# Altium PCB 8051.PcbDoc
Units mil, origin at the board's own origin, x right, y up, seen from the top; angles counter-clockwise.
Board outline 1970 x 1985 mil, 2 copper layers (Top Layer, Bottom Layer); 38 components, 61 nets, 222 pads, 176 vias.
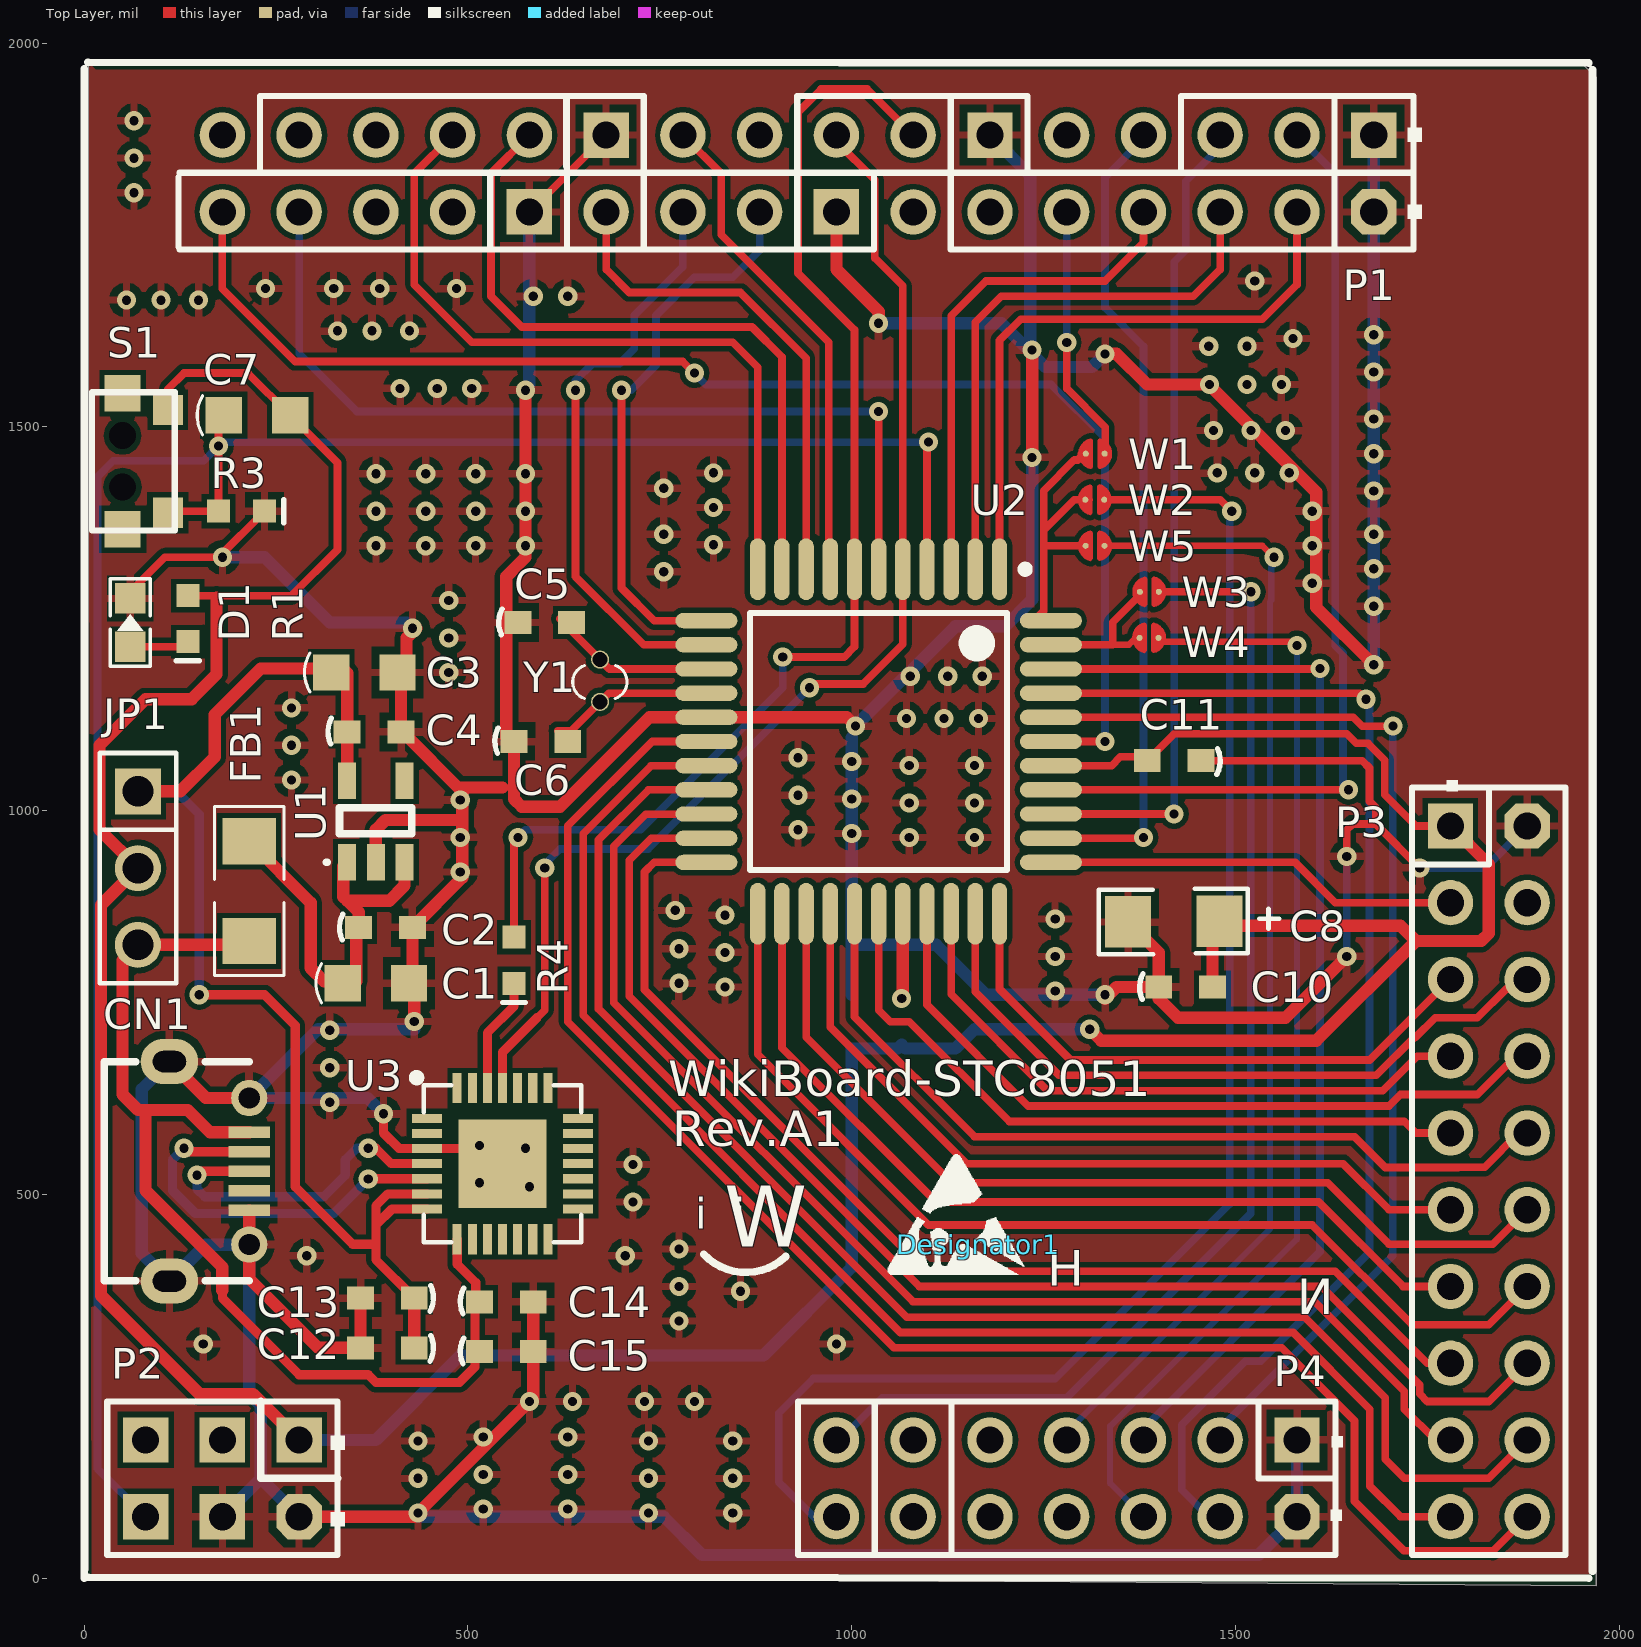
[diagram p0: Top Layer view]
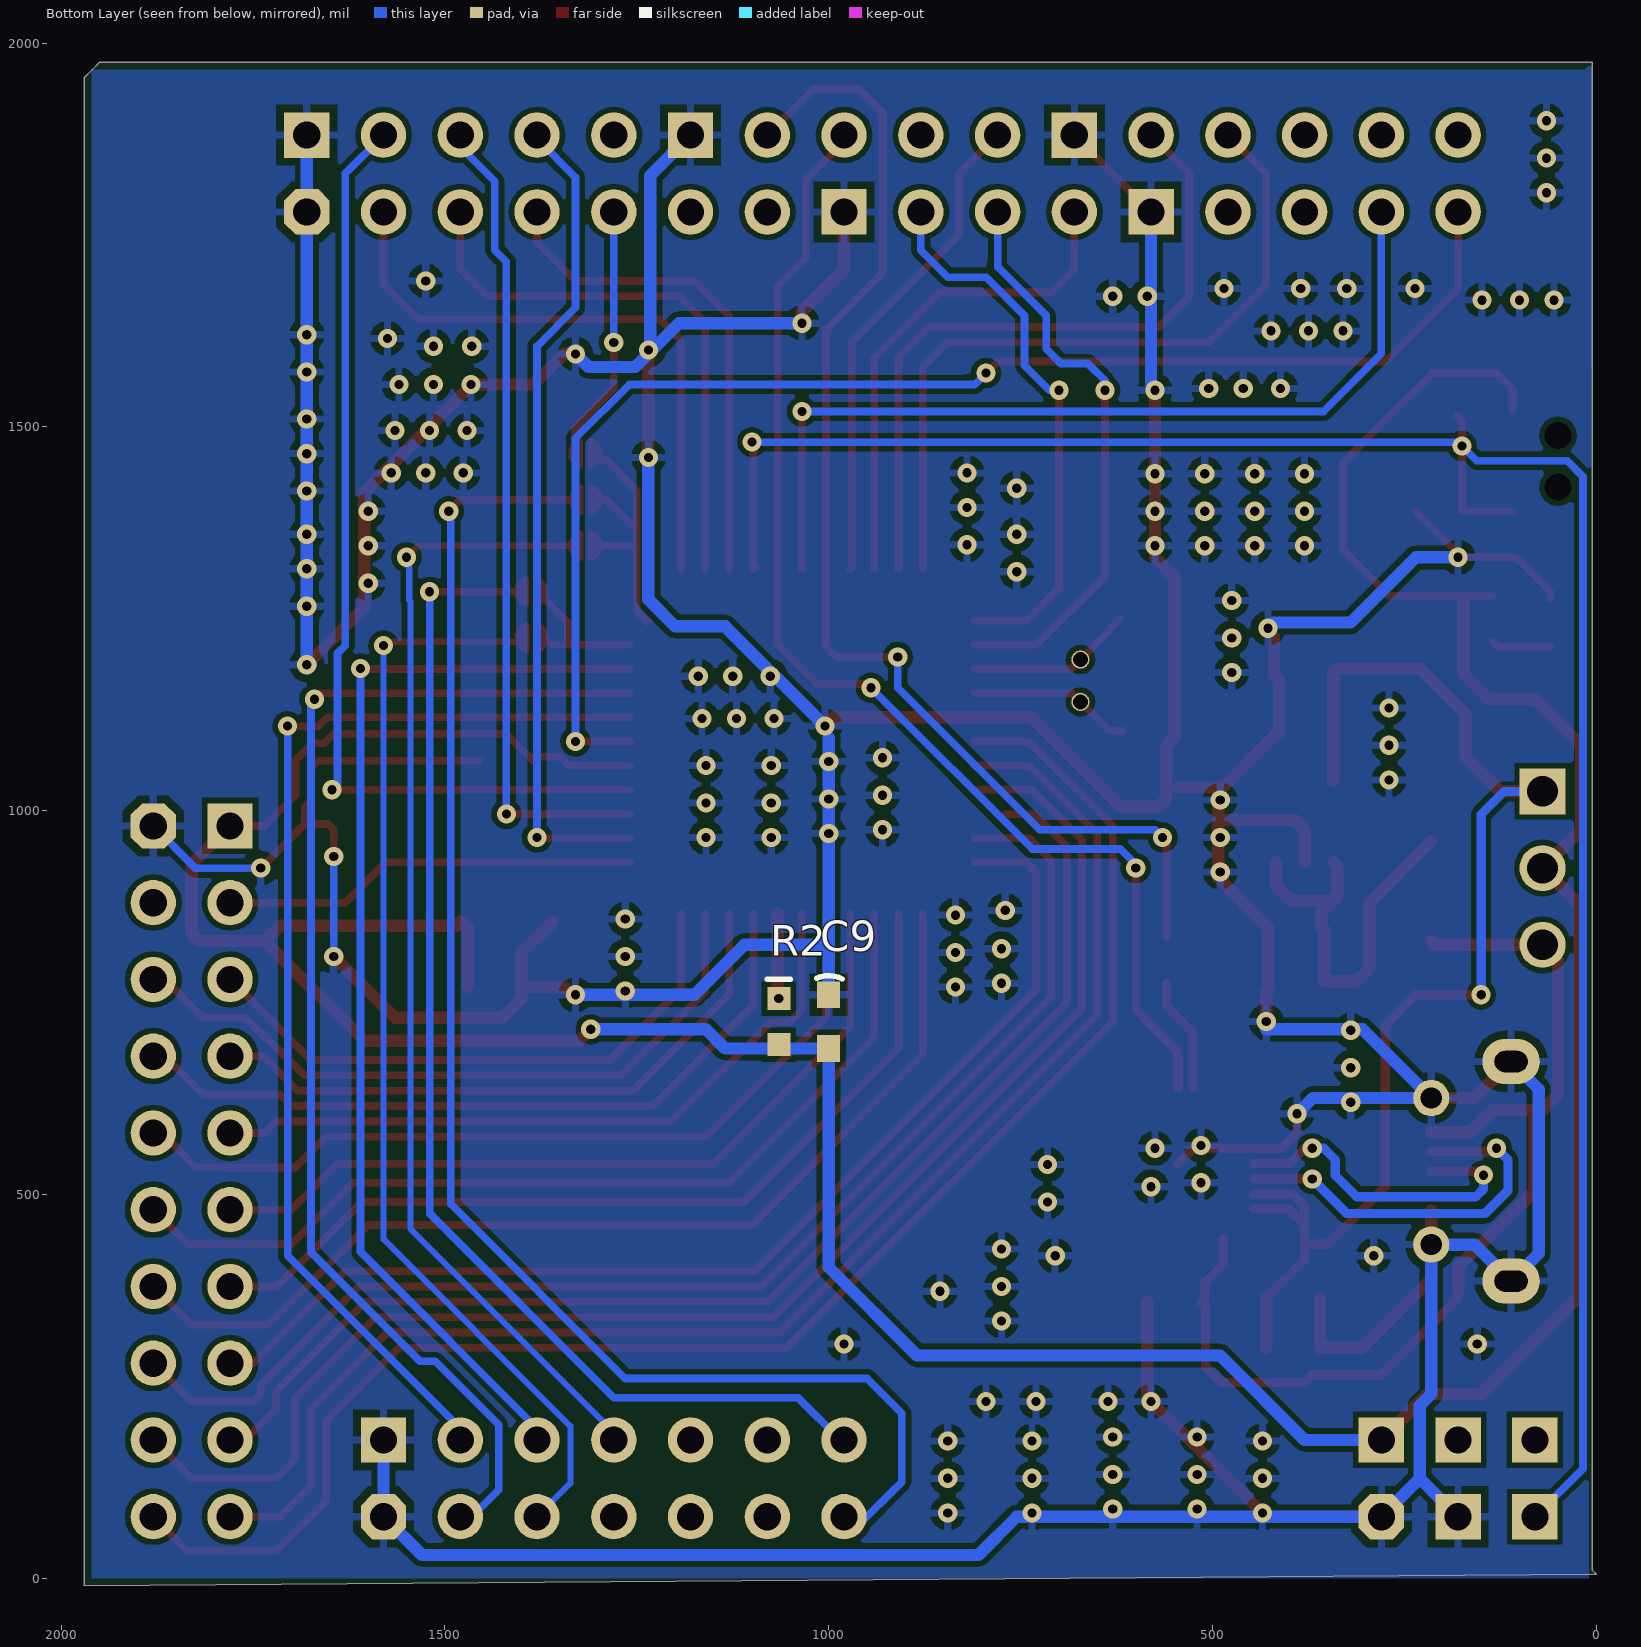
[diagram p1: Bottom Layer view, seen from below]

## Layer stack, top to bottom
Top Solder: solder mask 0.4, Solder Resist, Dk 3.5
Top Layer: signal copper 1.4
Dielectric 1: dielectric 12.6, FR-4, Dk 4.8
Bottom Layer: signal copper 1.4
Bottom Solder: solder mask 0.4, Solder Resist, Dk 3.5

## Board outline
0,5 5,10 5,1975 1950,1975 1960,1965 1970,1955 1970,-10

## Design rules (kind name [scope] priority, off if disabled: settings)
Clearance [All] p1: gap=7
PolygonConnect [All] p1: connectstyle=Relief reliefconductorwidth=10 reliefentries=4 polygonreliefangle="90 Angle" airgapwidth=10
RoomDefinition 8051 [InComponentClass('8051')] p1: confinementstyle=ConfineIn formatcopy=TRUE lockcomponents=FALSE outline -10,5 1985,5 1985,1980 -10,1980
RoutingVias [All] p1: holewidth=12 width=25 viastyle="Through Hole" minholewidth=12 minwidth=25 maxholewidth=28 maxwidth=50
SolderMaskExpansion [All] p1: expansion=4
Width [All] p1: maxlimit=30 minlimit=8 preferedwidth=10
29 further rules are at their usual default settings.

## Components (designator, comment, footprint, x,y, rotation, side; value= is the part's Value field where it differs from the comment)
C1 "10uF" C0805 380,775 r0 top
C2 "100nF" C0603L 392.6,847.6 r0 top
C3 "10uF" C0805 365,1180 r0 top
C4 "100nF" C0603L 377.6,1102.6 r0 top
C5 "22pF" C0603L 600,1245 r0 top
C6 "22pF" C0603L 595,1090 r0 top
C7 "10uF" C0805 225,1515 r0 top
C8 "10uF" TAJ-A 1470,855 r180 top
C9 "1uF" C0603L 1000,725 r270 bottom
C10 "0.1uF" C0603L 1435,770 r0 top
C11 "0.1uF" C0603L 1420,1065 r180 top
C12 "10uF" C0603L 395,300 r180 top
C13 "100nF" C0603L 395,365 r180 top
C14 "10uF" C0603L 550,360 r0 top
C15 "100nF" C0603L 550,295 r0 top
CN1 "USB-Micro" USB_MICRO_5S_B 215,530 r90 top
D1 "RED" SMT_LED_0603 60,1245 r90 top
Designator1 "Comment" NoTouch 1165,435 r0 top
FB1 "500mA" R1206 215,895 r90 top
JP1 "JP3" SIP3 70,1025 r270 top
P1 "WIKIPRHL-R" WIKIPRHL-R 1680,1880 r180 top locked
P2 "WIKIPWR-6P" WIKIPWR-6P 280,180 r180 top
P3 "WIKIGPIO-D" WIKIGPIO-D 1780,980 r270 top locked
P4 "WIKIADA" WIKIADA 1580,180 r180 top locked
R1 "10K" R0603 135,1250 r90 top
R2 "0R" R0603 1065,725 r270 bottom
R3 "10K" R0603 205,1390 r180 top
R4 "470" R0603 560,805 r90 top
S1 "RESET" KEY-2x4-SMD 50,1455 r90 top
U1 "LDO" SOT23-5 342.6,932.6 r0 top
U2 "STC8051" TQFP44 1035,1090 r270 top
U3 "CP2102" QFN28 545,540 r0 top
W1 "Jumper" Solderbridge#1 1304.88,1464.96 r0 top
W2 "Jumper" Solderbridge#2 1304.28,1404.96 r0 top
W3 "Jumper" Solderbridge#3 1400,1285 r180 top
W4 "Jumper" Solderbridge#4 1375,1225 r0 top
W5 "Jumper" Solderbridge#3 1329.28,1344.96 r180 top
Y1 "12MHz" XTAL0602 672.07,1169.14 r90 top

## Footprints (in the part's own frame and the unit in brackets; to place one, negate y for a bottom-side part, rotate by r counter-clockwise, add the part's x,y. Pads: shape width x height; smd on the part's side, far side on the other; paste and mask are expansions set on the pad)
C0603L [mil]
  rect 35x30 smd: 1(-35,0) 2(35,0)
  silkscreen extent -60,-16 -56,18, body extent -31,-16 32,15, height 24
C0805 [mm]
  rect 1.2x1.2 smd: 1(-1.1,0) 2(1.1,0)
  silkscreen extent -1.97,-0.65 -1.8,0.65, body extent -0.99,-0.61 1.01,0.59, height 1.2
KEY-2x4-SMD [mm] "6.8MM,2.8MM,SMD"
  rect 1.2x1.2 smd: 0(-2.25,0) 0(2.25,0)
  rect 1x1 smd: 1(-1.7,-1.5) 2(1.7,-1.5)
  round 0.8 hole 0.9 unplated: MH1(0.85,0) MH2(-0.85,0)
  silkscreen extent -2.29,-1.73 2.29,1.02, body extent -2.28,-1.6 2.29,0.94, height 1.1
NoTouch [mil]
  silkscreen extent -118,-39 60,117
QFN28 [mm]
  rect 1x0.3 smd: 1(-2.5,1.5) 2(-2.5,1) 3(-2.5,0.5) 4(-2.5,0) 5(-2.5,-0.5) 6(-2.5,-1) 7(-2.5,-1.5) 15(2.5,-1.5) 16(2.5,-1) 17(2.5,-0.5) 18(2.5,0) 19(2.5,0.5) 20(2.5,1) 21(2.5,1.5)
  rect 0.3x1 smd: 8(-1.5,-2.5) 9(-1,-2.5) 10(-0.5,-2.5) 11(0,-2.5) 12(0.5,-2.5) 13(1,-2.5) 14(1.5,-2.5) 22(1.5,2.5) 23(1,2.5) 24(0.5,2.5) 25(0,2.5) 26(-0.5,2.5) 27(-1,2.5) 28(-1.5,2.5)
  rect 2.921x2.921 smd paste-3.2: 29(0,0)
  silkscreen extent -2.97,-2.6 2.6,2.97, body extent -2.5,-2.5 2.5,2.5, height 1
R0603 [mil]
  rect 30x30 smd: 1(-30,0) 2(30,0)
  silkscreen extent -55,-15 -55,15, body extent -31,-16 32,15, height 18
R1206 [mil]
  rect 60x70 smd: 1(-65,0) 2(65,0)
  silkscreen extent -110,-45 110,45, body extent -62,-31 63,32, height 24
SIP3 [mil]
  rect 60x60 hole 40: 1(0,0)
  round 60 hole 40: 2(100,0) 3(200,0)
  silkscreen extent -50,-50 250,50
SMT_LED_0603 [mm] "SMT LED"
  rect 1x1 smd: 1(-0.8,0) 2(0.8,0)
  silkscreen extent -1.45,-0.66 1.45,0.66, body extent -0.81,-0.4 0.81,0.4, height 0.6
Solderbridge#1 [mm]
  round 0.2 smd paste-10: 1(0,0) 2(0.625,0)
  Top Layer region: 0.389,0.432 0.465,0.505 0.583,0.467 0.648,0.424 0.721,0.351 0.775,0.292 0.833,0.193 0.861,0.099 0.856,-0.122 0.831,-0.193 0.747,-0.33 0.663,-0.411 0.571,-0.469 0.47,-0.5 0.419,-0.483 0.389,-0.43
  Top Layer region: 0.236,-0.432 0.16,-0.505 0.042,-0.467 -0.023,-0.424 -0.097,-0.351 -0.15,-0.292 -0.208,-0.193 -0.236,-0.099 -0.231,0.122 -0.206,0.193 -0.122,0.33 -0.038,0.411 0.054,0.469 0.155,0.5 0.206,0.483 0.236,0.43
  Top Layer lines w0.152: 0.159,-0.431 cw(c0.27,0) -0.123,-0.207 cw(c0.27,0) -0.149,-0.149 cw(c0.27,0) -0.162,-0.103 cw(c0.27,0) 0.159,0.431 ; 0.465,-0.431 ccw(c0.355,0) 0.799,0 ccw(c0.355,0) 0.774,0.149 ccw(c0.355,0) 0.465,0.431
Solderbridge#2 [mm]
  round 0.2 smd paste-10: 1(0,0) 2(0.625,0)
  Top Layer region: 0.389,0.432 0.465,0.505 0.583,0.467 0.648,0.424 0.721,0.351 0.775,0.292 0.833,0.193 0.861,0.099 0.856,-0.122 0.831,-0.193 0.747,-0.33 0.663,-0.411 0.571,-0.469 0.47,-0.5 0.419,-0.483 0.389,-0.43
  Top Layer region: 0.236,-0.432 0.16,-0.505 0.042,-0.467 -0.023,-0.424 -0.097,-0.351 -0.15,-0.292 -0.208,-0.193 -0.236,-0.099 -0.231,0.122 -0.206,0.193 -0.122,0.33 -0.038,0.411 0.054,0.469 0.155,0.5 0.206,0.483 0.236,0.43
  Top Layer lines w0.152: 0.159,-0.431 cw(c0.27,0) -0.175,0 cw(c0.27,0) -0.149,0.149 cw(c0.27,0) 0.159,0.431 ; 0.465,-0.431 ccw(c0.355,0) 0.774,-0.149 ccw(c0.355,0) 0.799,0 ccw(c0.355,0) 0.465,0.431
Solderbridge#3 [mm]
  round 0.2 smd paste-10: 1(0,0) 2(0.625,0)
  Top Layer region: 0.389,0.432 0.465,0.505 0.583,0.467 0.648,0.424 0.721,0.351 0.775,0.292 0.833,0.193 0.861,0.099 0.856,-0.122 0.831,-0.193 0.747,-0.33 0.663,-0.411 0.571,-0.469 0.47,-0.5 0.419,-0.483 0.389,-0.43
  Top Layer region: 0.236,-0.432 0.16,-0.505 0.042,-0.467 -0.023,-0.424 -0.097,-0.351 -0.15,-0.292 -0.208,-0.193 -0.236,-0.099 -0.231,0.122 -0.206,0.193 -0.122,0.33 -0.038,0.411 0.054,0.469 0.155,0.5 0.206,0.483 0.236,0.43
  Top Layer lines w0.152: 0.465,0.431 cw(c0.355,0) 0.685,0.297 cw(c0.355,0) 0.465,-0.431 ; 0.159,0.431 ccw(c0.27,0) -0.175,0 ccw(c0.27,0) 0.159,-0.431
Solderbridge#4 [mm]
  round 0.2 smd paste-10: 1(0,0) 2(0.625,0)
  Top Layer region: 0.389,0.432 0.465,0.505 0.583,0.467 0.648,0.424 0.721,0.351 0.775,0.292 0.833,0.193 0.861,0.099 0.856,-0.122 0.831,-0.193 0.747,-0.33 0.663,-0.411 0.571,-0.469 0.47,-0.5 0.419,-0.483 0.389,-0.43
  Top Layer region: 0.236,-0.432 0.16,-0.505 0.042,-0.467 -0.023,-0.424 -0.097,-0.351 -0.15,-0.292 -0.208,-0.193 -0.236,-0.099 -0.231,0.122 -0.206,0.193 -0.122,0.33 -0.038,0.411 0.054,0.469 0.155,0.5 0.206,0.483 0.236,0.43
  Top Layer lines w0.152: 0.159,-0.431 cw(c0.27,0) -0.172,-0.045 cw(c0.27,0) 0.159,0.431 ; 0.465,-0.431 ccw(c0.355,0) 0.781,-0.127 ccw(c0.355,0) 0.774,0.149 ccw(c0.355,0) 0.465,0.431
SOT23-5 [mm]
  rect 0.6x1.2 smd: 1(0,0) 2(0.95,0) 3(1.9,0) 4(1.9,2.7) 5(0,2.7)
  silkscreen extent -0.69,0 2.13,1.8, body extent -0.32,0.7 2.35,2.1, height 1.1
TAJ-A [mil] "TAJ CAP A TYPE 3216"
  rect 60x66.93 smd: 1(-9,-1) 2(110,0)
  silkscreen extent -87,-43 148,42
TQFP44 [mm] "Thin QFP, 44-Leads, Body 10x10mm, Pitch 0.8mm, IPC Low Density"
  oval 2.05x0.508 smd: 1(-5.7,4) 2(-5.7,3.2) 3(-5.7,2.4) 4(-5.7,1.6) 5(-5.7,0.8) 6(-5.7,0) 7(-5.7,-0.8) 8(-5.7,-1.6) 9(-5.7,-2.4) 10(-5.7,-3.2) 11(-5.7,-4) 23(5.7,-4) 24(5.7,-3.2) 25(5.7,-2.4) 26(5.7,-1.6) 27(5.7,-0.8) 28(5.7,0) 29(5.7,0.8) 30(5.7,1.6) 31(5.7,2.4) 32(5.7,3.2) 33(5.7,4)
  oval 0.508x2.05 smd: 12(-4,-5.7) 13(-3.2,-5.7) 14(-2.4,-5.7) 15(-1.6,-5.7) 16(-0.8,-5.7) 17(0,-5.7) 18(0.8,-5.7) 19(1.6,-5.7) 20(2.4,-5.7) 21(3.2,-5.7) 22(4,-5.7) 34(4,5.7) 35(3.2,5.7) 36(2.4,5.7) 37(1.6,5.7) 38(0.8,5.7) 39(0,5.7) 40(-0.8,5.7) 41(-1.6,5.7) 42(-2.4,5.7) 43(-3.2,5.7) 44(-4,5.7)
  silkscreen extent -5.82,-4.25 4.25,4.98, body extent -5,-5 5,5, height 1.2
USB_MICRO_5S_B [mil] "USB Micro SMT 5S B"
  oval 59.06x74.8 hole 27.56 slot 43.31 at 90 deg: 0(-143,104) 0(143,104)
  round 47.24 hole 27.5: 0(-95.5,0) 0(95.5,0)
  rect 15x54 smd: 1(51,0) 2(25.5,0) 3(0,0) 4(-25.5,0) 5(-51,0)
  silkscreen extent -143,0 143,189, body extent -161,-9 161,204, height 105
WIKIADA [mm] "Connector; Header; 7x2 Position"
  rect 1.5x1.5 hole 0.9: 1(0,0)
  oct 1.5x1.5 hole 0.9: 2(0,2.54)
  round 1.5 hole 0.9: 3(2.54,0) 4(2.54,2.54) 5(5.08,0) 6(5.08,2.54) 7(7.62,0) 8(7.62,2.54) 9(10.16,0) 10(10.16,2.54) 11(12.7,0) 12(12.7,2.54) 13(15.24,0) 14(15.24,2.54)
  silkscreen extent -1.52,-1.27 16.51,3.81, body extent -1.27,-1.55 16.51,4.07, height 8.51
WIKIGPIO-D [mm] "Connector; Header; 9x2 Position"
  rect 1.5x1.5 hole 0.9: 1(0,0)
  oct 1.5x1.5 hole 0.9: 2(0,2.54)
  round 1.5 hole 0.9: 3(2.54,0) 4(2.54,2.54) 5(5.08,0) 6(5.08,2.54) 7(7.62,0) 8(7.62,2.54) 9(10.16,0) 10(10.16,2.54) 11(12.7,0) 12(12.7,2.54) 13(15.24,0) 14(15.24,2.54) 15(17.78,0) 16(17.78,2.54) 17(20.32,0) 18(20.32,2.54) 19(22.86,0) 20(22.86,2.54)
  silkscreen extent -1.52,-1.27 24.13,3.81, body extent -1.21,-1.5 24.19,4.12, height 8.51
WIKIPRHL-R [mm] "Connector; Header; 16x2 Position"
  rect 1.5x1.5 hole 0.9: 1(0,0) 11(12.7,0) 16(17.78,2.54) 21(25.4,0) 24(27.94,2.54)
  oct 1.5x1.5 hole 0.9: 2(0,2.54)
  round 1.5 hole 0.9: 3(2.54,0) 4(2.54,2.54) 5(5.08,0) 6(5.08,2.54) 7(7.62,0) 8(7.62,2.54) 9(10.16,0) 10(10.16,2.54) 12(12.7,2.54) 13(15.24,0) 14(15.24,2.54) 15(17.78,0) 17(20.32,0) 18(20.32,2.54) 19(22.86,0) 20(22.86,2.54) 22(25.4,2.54) 23(27.94,0) 25(30.48,0) 26(30.48,2.54) 27(33.02,0) 28(33.02,2.54) 29(35.56,0) 30(35.56,2.54) 31(38.1,0) 32(38.1,2.54)
  silkscreen extent -1.6,-1.3 39.55,3.78, body extent -1.3,-1.63 39.43,4.04, height 8.51
WIKIPWR-6P [mm] "Connector; Header; 3x2 Position"
  rect 1.5x1.5 hole 0.9: 1(0,0) 3(2.54,0) 4(2.54,2.54) 5(5.08,0) 6(5.08,2.54)
  oct 1.5x1.5 hole 0.9: 2(0,2.54)
  silkscreen extent -1.52,-1.27 6.35,3.81, body extent -1.21,-1.65 6.44,4.02, height 8.51
XTAL0602 [mm]
  round 0.6 hole 0.5: 1(-0.7,0) 2(0.7,0)
  silkscreen extent -0.59,-0.89 0.51,0.9

## Part data
C1 C2 C3 C4 C5 C6 C7 C9 C10 C11: library part Cap, "Capacitor"
C8: library part "Cap Pol1", "Polarized Capacitor (Radial)"
C12 C13 C14 C15: library part SMT_C_0402, "Surface mount capacitor 0402"
D1: library part LED0, "Typical INFRARED GaAs LED"
FB1: library part FB, "Ferrite Beads Inductors Impedance:120Ω±25% Rated Current:1500mA DC Resistance:0.095Ω"
P1: "Header, 16-Pin, Dual row"
P2: "PWR HDR"
P3: "Header, 9-Pin, Dual row"
P4: "Header, 14-Pin, Dual row"
R1 R2 R3: library part Res2, "Resistor"
R4: library part SMT_R_0402, "Surface mount resistor 0402"
S1: library part SW-PB, "Switch"
U1: library part LDO-SOT23-5, "General LDO SOT23-5"
U2: library part STC12LE5A, "STC12LE5A"
W1 W2 W3 W4 W5: "Jumper Wire"
Y1: library part XTAL, "Crystal Oscillator"

## Via types
v1: diameter 25, hole 12, Top Layer to Bottom Layer, 176 vias

## Nets (pads, with @x,y where several pads share a name; then routed paths per layer and width w, separated by ;. In a path a pad name is that pad's centre, name@x,y a point inside that pad or via, vN(x,y) a via of type N, cw(c..) or ccw(c..) an arc to the next point about the centre after c; other vN are vias at no path point)
51AIN0/CO2: P4.3 U2.40 | length 1473.6
  Top Layer w10: U2.40 1653.5,1121.5 1665,1110 v1(1705,1110)
  Bottom Layer w10: P4.3 1480,195 1705,420 v1(1705,1110)
51AIN1: P4.4 U2.41 | length 1623.3
  Top Layer w10: U2.41 1662.01,1152.99 v1(1670,1145)
  Bottom Layer w10: P4.4 1465,80 1430,115 1430,200 1512.5,282.5 1532.5,282.5 1674.51,424.51 1674.51,1140.49 v1(1670,1145)
51AIN2: P4.5 U2.42 | length 1463.1
  Top Layer w10: U2.42 1609.49,1184.49 v1(1610,1185)
  Bottom Layer w10: P4.5@1375,170 1375,190 1610,425 v1(1610,1185)
51AIN3/CPP0: U2.43 W3.2 W4.1 | length 193.2
  Top Layer w8: 1340,1215.98 1360.98,1215.98 1368.22,1223.22 1370,1225
  Top Layer w10: U2.43 1340,1215.98 1340,1245.28 1375.06,1280.34
51AIN4/CPP1/SS: U2.44 W1.1 W2.1 W5.2 | length 373.7
  Top Layer w10: U2.44@1236.18,1246.18 1250,1260 1250,1325 1250,1365 ; 1254.28,1344.96 1297.81,1344.96 W5.2 ; 1299.28,1464.96 1299.28,1461.68 1298.49,1460.89 1294.42,1456.82 1290.1,1456.82 1250,1416.71 1250,1365 ; 1309.28,1404.96 W2.1 1297.41,1404.96 1289.96,1404.96 1250,1365
51INT0: P1.19 U2.8 | length 645.1
  Top Layer w10: P1.19 830,1830 830,1750 970,1610 970,1316.42 U2.8
51INT1: P1.22 U2.9 | length 658.4
  Top Layer w10: P1.22 680,1705 710,1675 855,1675 940.51,1589.49 U2.9
51MISO: P1.6 U2.2 | length 744.2
  Top Layer w10: U2.2 1160.98,1635.98 1195,1670 1445,1670 1480,1705 P1.6
51MOSI: P1.4 U2.1 | length 810.6
  Top Layer w10: U2.1 1192.48,1612.48 1220,1640 1535,1640 1580,1685 P1.4
51NRST: C7.1 P2.6 R3.2 S1.1 U2.4 | length 2847.6
  Top Layer w10: S1.1 110.98,1390 R3.2 v1(175,1475) 175,1508.31 C7.1 ; U2.4@1095,1317.4 U2.4 1097.99,1477.99 v1(1100,1480)
  Bottom Layer w10: P2.6 17.28,142.72 17.28,1435.09 37.94,1455.75 155.75,1455.75 v1(175,1475) 180,1480 v1(1100,1480)
51RX1: P1.15 U2.5 U3.25 | length 1605.9
  Top Layer w10: 590,730 600,740 v1(600,925) ; v1(945,1160) 950,1165 1015,1165 1066.5,1216.5 U2.5 1066.5,1683.5 1030,1720 1030,1821.72 980,1871.72 P1.15
  Top Layer w12: U3.25 545.01,685.01 590,730
  Bottom Layer w10: v1(600,925) 595,925 620,950 735,950 v1(945,1160)
51RX2: P1.32 U2.39 | length 1796.4
  Top Layer w10: P1.32 180,1680 275,1585 780,1585 v1(795,1570) ; U2.39 v1(1330,1090)
  Bottom Layer w10: v1(795,1570) 810,1555 1260,1555 1330,1485 v1(1330,1090)
51SCK: P1.8 U2.3 | length 660.2
  Top Layer w10: U2.3 1129.49,1644.49 1175,1690 1330,1690 1380,1740 P1.8
51T0: P1.23 U2.10 | length 919
  Top Layer w10: P1.23 530,1830 530,1670 570,1630 870,1630 909.02,1590.98 U2.10
51T1: P1.25 U2.11 | length 970.8
  Top Layer w10: P1.25 430,1830 430,1685 505,1610 845,1610 877.52,1577.48 U2.11
51TX1: P1.13 R4.2 U2.7 | length 1611.2
  Top Layer w10: R4.2 560,960 v1(565,965) ; v1(910,1200) 990,1200 1003.5,1213.5 U2.7 1003.5,1626.5 930,1700 930,1910 960,1940 1020,1940 P1.13
  Bottom Layer w10: v1(565,965) 575,975 725,975 910,1160 v1(910,1200)
51TX2: P1.30 U2.6 | length 1176.7
  Top Layer w10: U2.6 v1(1035,1520)
  Bottom Layer w10: P1.30 280,1595 355,1520 v1(1035,1520)
51VDD: C7.2 C8.1 C9.2 C10.2 C11.2 JP1.2 P2.1 P3.1 R1.2 R2.2 S1.2 U2.38 | length 5162.5
  Top Layer w10: S1.2 109.06,1549.06 130,1570 213.31,1570 C7.2 330,1453.31 330,1340 270,1280 R1.2 ; U2.38 1338.5,1058.5 1350,1070 C11.2@1385,1070 ; C11.2 1420,1100 1645,1100 1657.5,1087.5 1672.5,1087.5 1694.51,1065.49 1694.51,1020.49 1735,980 P3.1
  Top Layer w16: 172.5,1277.5 172.5,1177.5 140,1145 80,1145 20,1085 20,975 JP1.2 22,877 22,368 150,240 220,240 P2.1 ; v1(1310,715) 1325,700 1605,700 1735,830 ; C10.2 1470,847 C8.1 1485,850 1715,850 1735,830 ; P3.1 1830,930 1830,840 1820,830 1735,830
  Bottom Layer w16: P2.1 380,180 490,290 885,290 1000,405 C9.2 1060,690 R2.2 1070,690 1135,690 1160,715 v1(1310,715)
51XTAL1: C6.2 U2.15 Y1.1 | length 213.8
  Top Layer w10: C6.2@617.07,1104.14 634.63,1104.14 Y1.1 683.48,1152.99 U2.15
51XTAL2: C5.2 U2.14 Y1.2 | length 220.2
  Top Layer w10: C5.2@620,1250 635.86,1234.14 634.63,1234.14 Y1.2 684.28,1184.49 U2.14
ACTIVE: U3.11
CTS: U3.23
D3V3: C3.1 C4.1 C12.1 C13.1 JP1.1 U1.5 U3.6 U3.7 | length 1682.9
  Top Layer w12: v1(150,760) 235,760 275,720 275,510 350,435 380,435 ; C13.1 380,415 380,435 ; U3.7 400.95,480.95 380,460 ; U3.6 395.63,500.63 380,485 380,460 ; 380,435 380,460
  Top Layer w16: JP1.1 125,1025 170,1070 170,1125 230,1185 336.89,1185 342.6,1179.29 C4.1 U1.5 ; C12.1 C13.1
  Bottom Layer w12: JP1.1 120,1025 150,995 v1(150,760)
DSR: U3.27
DTR: U3.28
GND: C1.2 C2.2 C3.2 C4.2 C5.1 C6.1 C8.2 C9.1 C10.1 C11.1 C12.2 C13.2 C14.2 C15.2 CN1.0 CN1.5 D1.2 P1.1 P1.2 P1.11 P1.16 P1.21 P1.24 P2.2 P2.4 P3.2 P4.1 P4.2 R3.1 U1.2 U2.16 U3.3 U3.29 | length 11308.5
  Top Layer w10: D1.2 60,1285 105,1330 175,1330 R3.1 ; P1.24@590,1780 590,1790 P1.21 ; C11.1 1665,1065 1674.51,1055.49 1674.51,1012.21 1682.5,1004.22 1682.5,982.5 ; v1(1645,940) 1645,975 1652.5,982.5 1682.5,982.5 ; v1(1740,925) 1682.5,982.5
  Top Layer w12: v1(390,605) 390,580 410.31,559.69 U3.3 525.32,559.69 U3.29
  Top Layer w16: CN1.0@111,673 158.5,625.5 CN1.0@215,625.5 ; v1@175,1330 v1(180,1330) ; CN1.5 215,434.5 215,390 305,300 C12.2 C13.2 ; P2.2 430,80 585,235 C15.2 C14.2 ; U1.2 380,975 392.6,987.6 482.6,987.6 ; v1(427.6,1237.6) 432.6,1237.6 420,1225 420,1176.69 412.6,1169.29 C4.2 414.59,1102.6 v1@492.6,1024.59 ; v1(430,725) 430,766.69 427.6,769.09 C2.2 492.6,912.6 v1@492.6,1024.59 ; 487.19,1030 545,1030 ; 495.61,1027.6 v1@492.6,1024.59 ; v1(575,1547.5) 575,1330 550,1305 550,1095 560,1085 560,1015 570,1005 620,1005 736.5,1121.5 U2.16 993.5,1121.5 v1(1005,1110) ; P1.16 980,1705 1035,1650 v1(1035,1635) ; v1(1235,1460) v1(1235,1600) ; v1(1330,760) 1330,755 1345,770 C10.1 ; v1(1330,1595) 1345,1595 1385,1555 1465,1555 1605,1415 1605,1265 v1(1680,1190) ; C8.2 1400,815 C10.1 ; v1(1645,810) 1565,730 1425,730 1400,755 C10.1
  Bottom Layer w10: v1(1645,810) v1(1645,940) ; v1(1740,925) 1825,925 P3.2
  Bottom Layer w16: CN1.0@111,673 75,637 75,423 111,387 158.5,434.5 215,434.5 215,240 230,225 230,130 ; P2.4 230,130 ; v1(180,1330) 235,1330 320,1245 420.2,1245 v1(427.6,1237.6) ; v1(390,605) 369.5,625.5 215,625.5 304.5,715 v1@430,715 ; v1(575,1547.5) 575,1550 580,1555 P1.24 ; C9.1 1000,825 ; 1000,1095 1000,825 ; v1(1005,1110) 1135,1240 1200,1240 1235,1275 v1(1235,1460) ; v1(1035,1635) 1195,1635 1252,1578 1313,1578 v1(1330,1595) ; P1.11 1232.47,1827.53 1232.47,1602.53 v1(1235,1600) ; v1(1330,760) 1175,760 1110,825 1000,825 ; P4.1 P4.2 1530,30 805,30 755,80 P2.2 230,130 ; v1(1680,1190) 1675,1190 1680,1195 P1.1
  other v1: 435,85 735,85 845,85 520,90 630,90 435,130 735,130 845,130 520,135 630,135 435,178.75 735,178.75 845,178.75 520,183.75 630,183.75 580,230 636.25,230 730,230 795,230 155,305 980,305 775,335 855,373.75 775,380 290,420 705,420 775,428.75 715,490 580,510 515,515 715,538.75 575,560 515,563.75 320,620 320,665 320,713.75 1265,765 835,770 775,775 1265,810 835,815 775,820 1265,858.75 835,863.75 770,870 490,920 490,965 1075,965 1160,965 1000,970 930,975 1075,1010 1160,1010 490,1013.75 1000,1015 930,1020 270,1040 1075,1058.75 1160,1058.75 1000,1063.75 930,1068.75 270,1085 1071.25,1120 1120,1120 1165,1120 270,1133.75 1076.25,1175 1125,1175 1170,1175 475,1180 475,1225 1680,1266.25 475,1273.75 1600,1296.25 755,1311.25 1680,1315 380,1345 445,1345 510,1345 575,1345 1600,1345 820,1346.25 755,1360 1680,1360 380,1390 445,1390 510,1390 575,1390 1600,1390 820,1395 1680,1416.25 755,1420 380,1438.75 445,1438.75 510,1438.75 575,1438.75 820,1440 1476.25,1440 1525,1440 1570,1440 1680,1465 1471.25,1495 1520,1495 1565,1495 1680,1510 411.25,1550 460,1550 505,1550 1466.25,1555 1515,1555 1560,1555 1680,1571.25 1465,1605 1515,1605 1575,1615 1680,1620 330,1625 375,1625 423.75,1625 55,1665 100,1665 148.75,1665 585,1670 630,1670 236.25,1680 325,1680 385,1680 485,1680 1525,1690 65,1805 65,1850 65,1898.75
NetC1_1: C1.1 C2.1 FB1.2 U1.1 U1.3 | length 544.6
  Top Layer w16: FB1.2 295,880 295,795 312.4,777.6 354.29,777.6 354.29,844.29 C2.1 357.6,867.6 342.6,882.6 ; U1.1 337.6,927.6 337.6,887.6 342.6,882.6 ; U1.3 417.4,902.4 397.6,882.6 342.6,882.6
NetD1_1: D1.1 R1.1 | length 77.7
  Top Layer w10: D1.1 128.5,1213.5 R1.1
NetP1_10: P1.10 W1.2 | length 345
  Top Layer w10: v1(1280,1610) 1280,1550 1330.46,1499.54 1330.46,1455.86
  Bottom Layer w10: v1(1280,1610) P1.10
NetP4_6: P4.6 W4.2 | length 1436
  Top Layer w8: 1400,1220 1405.74,1220 1570,1220 1575,1215 v1(1580,1215)
  Bottom Layer w8: P4.6 1336.47,123.53 1336.47,198.03 1580,441.56 v1(1580,1215)
NetP4_7: P4.7 W5.1 | length 1488.8
  Top Layer w8: W5.1 1336.15,1344.96 1535.04,1344.96 v1(1550,1330)
  Bottom Layer w8: P4.7 1280,190 1545,455 1545,1272.52 1546.5,1274.02 1546.5,1316.5 1550,1320 v1(1550,1330)
NetP4_13: P4.13 W3.1 | length 1592.2
  Top Layer w10: W3.1 1406.87,1285 v1(1520,1285)
  Bottom Layer w10: P4.13 985,180 1040,235 1280,235 1520,475 v1(1520,1285)
NetP4_14: P4.14 W2.2 | length 1979.6
  Top Layer w10: 1324.28,1419.96 1331.7,1406.52 W2.2@1332.57,1404.96 ; W2.2 W2.2@1332.57,1404.96 ; v1(1495,1390) 1480.04,1404.96 1335.75,1404.96 W2.2@1332.57,1404.96
  Bottom Layer w10: P4.14@975.86,75.86 954.14,75.86 915,115 905,125 905,215 950,260 1265,260 1492.5,487.5 1492.5,1392.5 v1(1495,1390)
NetR4_1: R4.1 U3.26 | length 150.9
  Top Layer w12: U3.26 525.32,710.32 560,745 R4.1
P0.0: P1.3 U2.37 | length 1268.3
  Top Layer w10: U2.37 v1(1647.01,1027.01)
  Bottom Layer w10: P1.3 1630,1830 1630,1215 1640,1205 1640,1034.02 v1(1647.01,1027.01)
P0.1: P1.5 U2.36 | length 1069.9
  Top Layer w10: U2.36 v1(1420,995.51)
  Bottom Layer w10: v1(1420,995.51) 1420,1715 1435,1730 1435,1820 1480,1865 P1.5
P0.2: P1.7 U2.35 | length 1077.4
  Top Layer w10: U2.35 1379.02,964.02 v1(1380,965)
  Bottom Layer w10: v1(1380,965) 1380,1605 1330,1655 1330,1825 1380,1875 P1.7
P0.3: P3.3 U2.34 | length 542.3
  Top Layer w10: U2.34 1577.48,932.52 1630,880 P3.3
P0.4: P3.5 U2.33 | length 767.4
  Top Layer w10: U2.33 1192.48,767.52 1285,675 1675,675 P3.5
P0.5: P3.6 U2.32 | length 899.8
  Top Layer w10: U2.32 1160.98,764.02 1270,655 1683.28,655 1733.28,705 1735,705 1760,730 1815,730 1852.5,767.5 P3.6@1867.5,767.5
P0.6: P3.7 U2.31 | length 826.2
  Top Layer w10: U2.31 1129.49,760.51 1255,635 1691.57,635 1736.57,680 P3.7
P0.7: P3.8 U2.30 | length 982.2
  Top Layer w10: U2.30 1097.99,747.01 1230,615 1699.85,615 1714.85,630 1815,630 1865,680 P3.8
P2.0: P3.19 U2.18 | length 1893.1
  Top Layer w10: U2.18 738.5,1058.5 650,970 650,733.28 1063.28,320 1575,320 1675,220 1675,120 1715,80 P3.19
P2.1: P3.18 U2.19 | length 1918.7
  Top Layer w10: U2.19 735.29,1027.01 670,961.72 670,741.57 1071.57,340 1590,340 1695,235 1695,155 1720,130 1830,130 P3.18
P2.2: P3.17 U2.20 | length 1640.5
  Top Layer w10: 770,995 731.57,995 690,953.43 690,749.85 1079.85,360 1603.28,360 1720,243.28 1720,220 1760,180 P3.17
P2.3: P3.16 U2.21 | length 1705.7
  Top Layer w10: U2.21 739.02,964.02 710,935 710,758.14 1088.14,380 1611.57,380 1740,251.57 1740,240 1750,230 1830,230 P3.16
P2.4: P3.15 U2.22 | length 1490.8
  Top Layer w10: U2.22 742.52,932.52 730,920 730,766.42 1096.42,400 1630,400 1750,280 P3.15
P2.5: P3.14 U2.23 | length 1352.3
  Top Layer w10: U2.23 877.52,682.48 1100,460 1600,460 1730,330 1830,330 P3.14
P2.6: P3.13 U2.24 | length 1174.4
  Top Layer w10: U2.24 909.02,690.98 1110,490 1608.28,490 1718.28,380 P3.13
P2.7: P3.12 U2.25 | length 1230.9
  Top Layer w10: U2.25 940.51,704.49 1130,515 1620,515 1700,435 1835,435 P3.12
P3.6: P1.18 U2.12 | length 740
  Top Layer w10: v1(700,1547.5) 702.5,1550 705,1550 700,1545 700,1290 742.52,1247.48 U2.12
  Bottom Layer w10: v1(700,1547.5) 712.5,1547.5 745,1580 745,1645 795,1695 845,1695 880,1730 P1.18
P3.7: P1.20 U2.13 | length 761
  Top Layer w10: v1(640,1547.5) 640,1305 729.02,1215.98 U2.13
  Bottom Layer w10: v1(640,1547.5) 640,1560 662.5,1582.5 697.5,1582.5 716.72,1601.72 716.72,1645 780,1708.28 P1.20
P4.0: P3.20 U2.17 | length 2097.1
  Top Layer w10: U2.17 740,1090 630,980 630,725 1055,300 1560,300 1655,205 1655,100 1719.53,35.47 1834.53,35.47 1835,35 P3.20
P4.1: P3.9 U2.28 | length 936.9
  Top Layer w10: U2.28 1035,740 1050,725 1075,725 1205,595 1720,595 1735,580 P3.9
P4.4: P3.11 U2.26 | length 1054.2
  Top Layer w10: U2.26 972.01,717.99 1150,540 1640,540 1700,480 P3.11
P4.5: P3.10 U2.27 | length 1110.6
  Top Layer w10: U2.27 1003.5,731.5 1160,575 1655,575 1695,535 1790,535 1790.47,535.47 1824.53,535.47 1869.06,580 P3.10
P4.6: R2.1 U2.29 | length 111.2
  Top Layer w16: v1(1065,755) 1066.5,756.5 U2.29
RTS: U3.24
USB5V: C14.1 C15.1 CN1.1 FB1.1 JP1.3 U3.8 | length 1383.9
  Top Layer w12: 180,375 180,365 280,265 370,265 380,255 489,255 509,275 509,354 C14.1 ; U3.8 485.95,409.05 510,385 C14.1@510,360
  Top Layer w16: 180,375 180,405 80,505 80,610 ; CN1.1 164,581 135,610 80,610 ; FB1.1 210,825 JP1.3 50,805 50,630 70,610 80,610
USB_DM: CN1.2 U3.5 | length 510.9
  Top Layer w12: v1(130,560) 134.5,555.5 CN1.2 ; v1(370,520) 370.32,520.32 U3.5
  Bottom Layer w12: v1(130,560) 115,545 115,505 145,475 325,475 v1(370,520)
USB_DP: CN1.3 U3.4 | length 437.9
  Top Layer w12: v1(147,525) 152,530 CN1.3 ; v1(370,560) 380,560 400,540 U3.4
  Bottom Layer w12: v1(147,525) 147,507 157,497 312,497 340,525 340,545 355,560 v1(370,560)
pads on no net: CN1.4 P1.9 P1.12 P1.14 P1.17 P1.26 P1.27 P1.28 P1.29 P1.31 P2.3 P2.5 P3.4 P4.8 P4.9 P4.10 P4.11 P4.12 S1.0 S1.MH1 S1.MH2 U1.4 U3.1 U3.2 U3.9 U3.10 U3.12 U3.13 U3.14 U3.15 U3.16 U3.17 U3.18 U3.19 U3.20 U3.21 U3.22

## Polygon pours and split planes (outlines as drawn)
GND on Top Layer "Top Layer-No Net" (solid, remove dead copper, pour order 2): 5,1975 15,1965 1960,1965 1960,15 1965,10 1960,5 10,5
GND on Bottom Layer "Top Layer-No Net" (solid, remove dead copper, pour order 4): 5,1975 15,1965 1960,1965 1960,0 1970,-10 1960,0 10,0

## Silkscreen, mask and mechanical layers (free items; w line width, h text height)
Top Overlay:
  lines w10: 0,0 0,1966.06 ; 5,1.06 1960,0 ; 5,1975 1960,1973.94 ; 807,422 ccw(c862,474) 914,419 ; 1965,8.94 1965,1965
  text "WikiBoard-STC8051" at 761,613 h78.74
  text "Rev.A1" at 766,548 h78.74
  text "i  i" at 796,455 h40
  text "W" at 834,432 h80
  text "H" at 1255,365 h80
  text "N" at 1628,328 h80